# EAGLE board Quad_ESC (EAGLE 9.6.2)
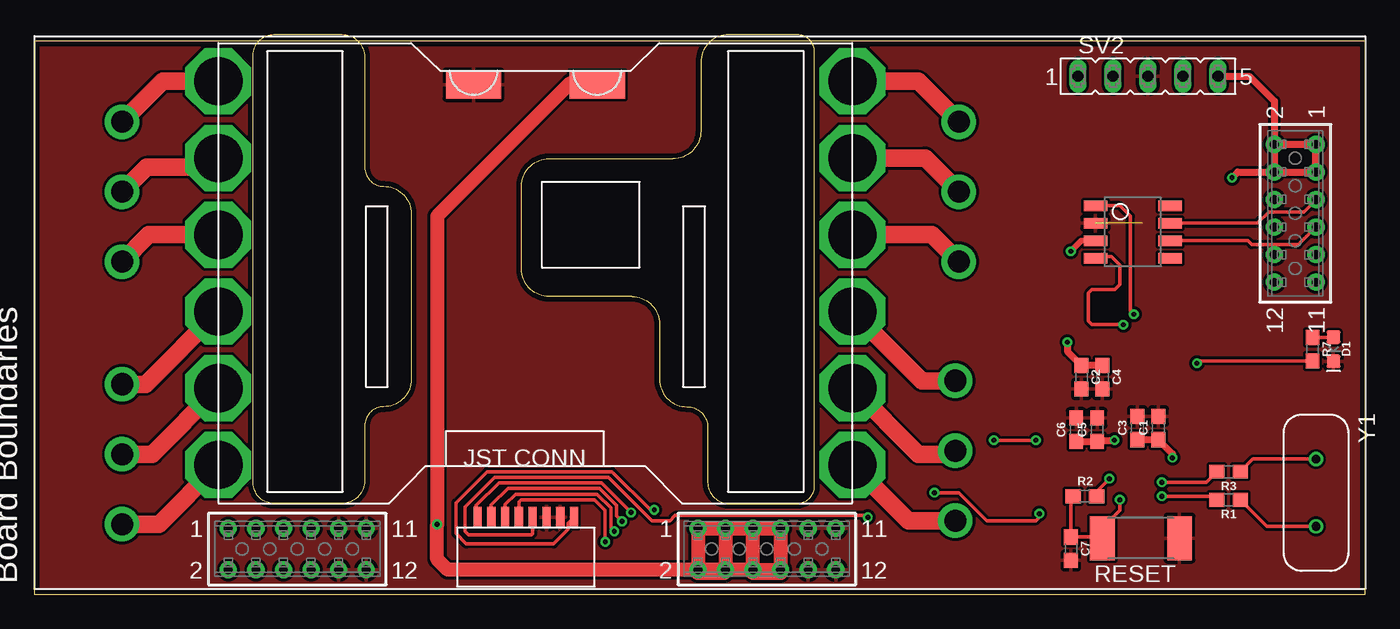
[diagram p0: board, top side]
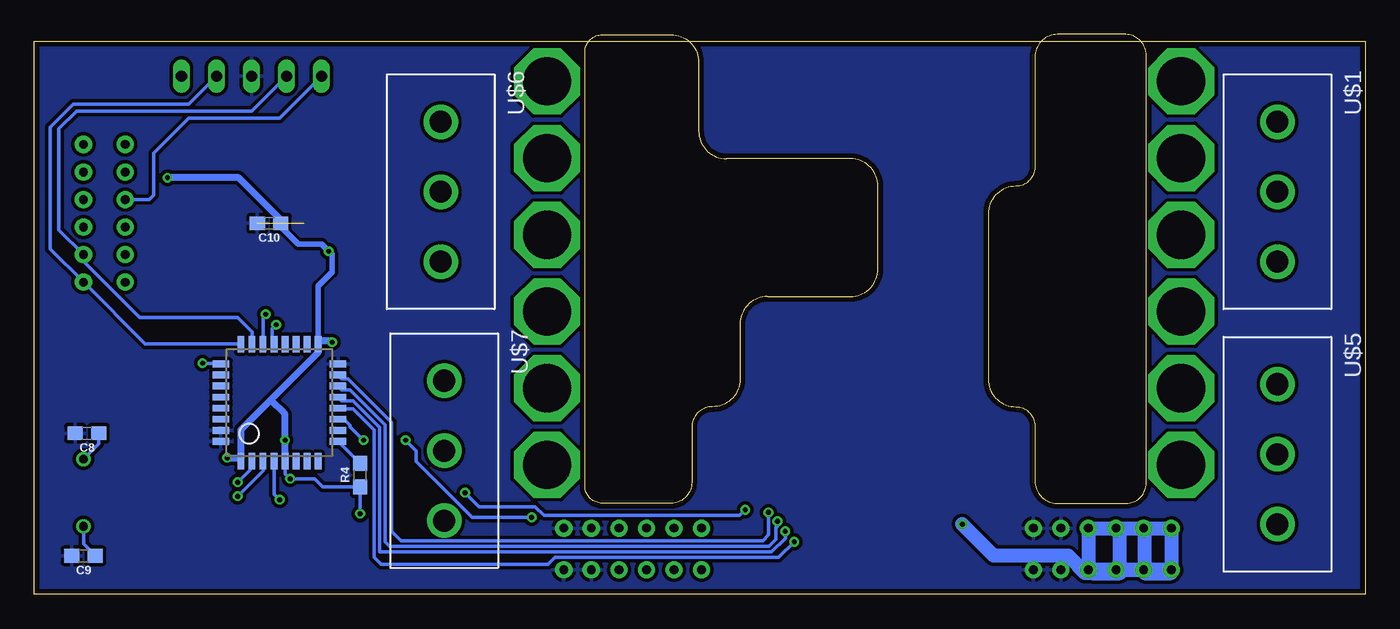
[diagram p1: board, bottom side, seen from below]

Size 96.52 x 40.13 mm. Coordinates in mm from the lower left corner, seen from the top.
Outline: 0,0 96.52,0 96.52,40.13 0,40.13 0,0
Copper layers (1*16): Top 0.0356mm / dielectric 1.5011mm / Bottom 0.0356mm
Design rules "ECE_Senior_Design": minimum track width 8mil, minimum drill 13mil, track to track 8mil, track to pad 8mil, pad to pad 6mil, via to via 8mil, smd to smd 6mil, copper to edge 15mil, drill to drill 8mil, minimum pad ring 7mil, minimum via ring 7mil, stop-mask expansion 3mil, vias tented up to drill 0mil, thermal gap 10mil

## Footprints (pad centres in the part's own frame; a part is rotated, then mirrored left to right if it is on the bottom)
0603 = smd 1.1 x 1: 1 -0.85,0; 2 0.85,0
LED-0603 = smd 1 x 1: A -0.877,0; C 0.877,0
SW_2512 = smd 1.8 x 3.2: 1 -2.8,0; 2 2.8,0
FE05-1 = drill 0.813 long: 1 -5.08,0; 2 -2.54,0; 3 0,0; 4 2.54,0; 5 5.08,0
3PINCONNECTOR = drill 1.6 pad 2.5: A -5.08,0; B 0,0; C 5.08,0
8PI_CONNECTOR = smd 0.6 x 1.5: P$1 1.5,-0.75; P$2 2.5,-0.75; P$3 3.5,-0.75; P$4 4.5,-0.75; P$5 5.5,-0.75; P$6 6.5,-0.75; P$7 7.5,-0.75; P$8 8.5,-0.75
BACKPLANE_CONNECTORS = drill 0.64 pad 1.24: 1 -5,1.511; 2 -5,-1.511; 3 -3,1.511; 4 -3,-1.511; 5 -1,1.511; 6 -1,-1.511; 7 1,1.511; 8 1,-1.511; 9 3,1.511; 10 3,-1.511; 11 5,1.511; 12 5,-1.511; 13 29.061,1.511; 14 29.061,-1.511; 15 31.061,1.511; 16 31.061,-1.511; 17 33.061,1.511; 18 33.061,-1.511; 19 35.061,1.511; 20 35.061,-1.511; 21 37.061,1.511; 22 37.061,-1.511; 23 39.061,1.511; 24 39.061,-1.511; 25 73.901,29.359; 26 70.879,29.359; 27 73.901,27.359; 28 70.879,27.359; 29 73.901,25.359; 30 70.879,25.359; 31 73.901,23.359; 32 70.879,23.359; 33 73.901,21.359; 34 70.879,21.359; 35 73.901,19.359; 36 70.879,19.359
STM32F042K6T6 = smd 1.2 x 0.5: NRST 0,3.2; PA0 0,1.6; PA1 0,0.8; PA2 0,0; PA8 8.5,0.8; PA9 8.5,1.6; PA10 8.5,2.4; PA11 8.5,3.2; PA12 8.5,4; PA13 8.5,4.8; PA14 8.5,5.6; PF0-OSC_IN 0,4.8; PF1-OSC_OUT 0,4; VDD 0,5.6; VDDA 0,2.4; VDDIO2 8.5,0 | smd 0.5 x 1.2: PA3 1.45,-1.45; PA4 2.25,-1.45; PA5 3.05,-1.45; PA6 3.85,-1.45; PA7 4.65,-1.45; PA15 7.05,7.05; PB0 5.45,-1.45; PB1 6.25,-1.45; PB3 6.25,7.05; PB4 5.45,7.05; PB5 4.65,7.05; PB6 3.85,7.05; PB7 3.05,7.05; PB8-BOOT0 2.25,7.05; VSS 7.05,-1.45; VSS1 1.45,7.05
TCAN337D = smd 1.7 x 0.75: CANH 5.4,2.54; CANL 5.4,1.27; FAULT 5.4,0; GND 0,2.54; RXD 0,0; S 5.4,3.81; TXD 0,3.81; VCC 0,1.27
LUMENIER_QUAD = drill 3.5 pad 4.8 octagon: 1 0,30.62; 2 0,25.05; 3 0,19.48; 4 0,13.92; 5 0,8.35; 6 0,2.78; 7 46,2.78; 8 46,8.35; 9 46,13.92; 10 46,19.48; 11 46,25.05; 12 46,30.62 | smd 4 x 2: GND 18.51,30.37; VIN 27.49,30.37
XTAL_ECS-80-S-4X = drill 0.63 pad 1.03: 1 -2.44,0; 2 2.44,0

## Placement (x,y rotation side)
C1  4.7uF  [0603]  81.53,12.06 90 top
C2  4.7uF  [0603]  75.95,15.75 270 top
C3  4.7uF  [0603]  80.01,12.06 90 top
C4  4.7uF  [0603]  77.47,15.75 270 top
C5  4.7uF  [0603]  77.09,11.94 90 top
C6  4.7uF  [0603]  75.56,11.94 90 top
C7  4.7uF  [0603]  75.18,3.3 270 top
C8  4.7uF  [0603]  92.71,11.68 180 bottom
C9  4.7uF  [0603]  92.96,2.79 180 bottom
C10  100nF  [0603]  79.5,26.92 180 bottom
D1  [LED-0603]  94.23,17.78 270 top
R1  1k  [0603]  86.61,6.86 180 top
R2  1k  [0603]  76.2,7.11 0 top
R3  1k  [0603]  86.61,8.89 180 top
R4  10k  [0603]  72.9,8.64 90 bottom
R7  [0603]  92.71,17.78 270 top
RESET  [SW_2512]  80.26,4.06 180 top
SV2  [FE05-1]  80.77,37.59 0 top
U$1  3PINCONNECTOR  [3PINCONNECTOR]  6.35,29.21 270 bottom
U$2  8PIN_CONNECTOR  [8PI_CONNECTOR]  40.64,4.83 180 top
U$3  BACKPLANE_CONNECTORS  [BACKPLANE_CONNECTORS]  19.06,3.28 0 top
U$4  STM32F042K6T6  [STM32F042K6T6]  75.95,9.65 90 bottom
U$5  3PINCONNECTOR  [3PINCONNECTOR]  6.35,10.16 270 bottom
U$6  3PINCONNECTOR  [3PINCONNECTOR]  67.06,29.21 270 bottom
U$7  3PINCONNECTOR  [3PINCONNECTOR]  66.8,10.41 270 bottom
U$8  TCAN337D  [TCAN337D]  76.96,24.38 0 top
U$10  LUMENIER_QUAD  [LUMENIER_QUAD]  13.34,6.6 0 top
Y1  ECS-80-S-4X  [XTAL_ECS-80-S-4X]  92.96,7.37 270 top

## Library data of the parts
C1-C10 = SparkFun-Capacitors; PROD_ID: CAP-08280
D1 = SparkFun-LED
R1-R3 = SparkFun-Resistors; PROD_ID: RES-07856
R4 = SparkFun-Resistors; PROD_ID: RES-00824
R7 = SparkFun-Resistors
RESET = DiscreteComponents
SV2 = con-lsta; OC_FARNELL: unknown; OC_NEWARK: unknown
U$1-U$3 U$5-U$7 U$10 = BLHeli_32 45A
U$4 U$8 = PI_Shield_Library
Y1 = ECS-80-S-4X; DESCRIPTION: Crystal 8MHz Series 2-Pin HC-49/U; DIGI-KEY_PART_NUMBER: X1057-ND; DIGI-KEY_PURCHASE_URL: https://www.digikey.com/product-detail/en/ecs-inc/ECS-80-S-4X/X1057-ND/827549?utm_source=snapeda&utm_medium=aggregator&utm_campaign=symbol; MF: ECS International; MP: ECS-80-S-4X; PACKAGE: HC-49/US ECS International

## Nets
+3V3: C1.1 C2.1 C3.1 C4.1 C5.1 C6.1 C10.1 R2.2 R4.1 SV2.5 U$2.P$1 U$3.25 U$3.26 U$3.27 U$3.28 U$4.VDD U$4.VDDA U$4.VDDIO2 U$8.VCC
+12V: U$3.1 U$3.2 U$3.3 U$3.4 U$3.5 U$3.6 U$3.7 U$3.8 U$3.13 U$3.14 U$3.15 U$3.16 U$3.17 U$3.18 U$3.19 U$3.20 U$10.VIN
CAN_H: U$3.29 U$8.CANH
CAN_L: U$3.31 U$8.CANL
CAN_RX: U$4.PA11 U$8.RXD
CAN_TX: U$4.PA12 U$8.TXD
ESC1_B: U$1.A U$10.1
ESC1_R: U$1.C U$10.3
ESC1_Y: U$1.B U$10.2
ESC2_B: U$5.A U$10.4
ESC2_R: U$5.C U$10.6
ESC2_Y: U$5.B U$10.5
ESC3_B: U$6.A U$10.12
ESC3_R: U$6.C U$10.10
ESC3_Y: U$6.B U$10.11
ESC4_B: U$7.A U$10.9
ESC4_R: U$7.C U$10.7
ESC4_Y: U$7.B U$10.8
GND: C1.2 C2.2 C3.2 C4.2 C5.2 C6.2 C7.2 C8.2 C9.2 C10.2 D1.C RESET.1 SV2.3 U$2.P$2 U$2.P$3 U$3.9 U$3.10 U$3.11 U$3.12 U$3.21 U$3.22 U$3.23 U$3.24 U$4.PB8-BOOT0 U$4.VSS U$4.VSS1 U$8.GND U$10.GND
LED: R7.2 U$4.PA15
N$1: C9.1 R1.1 Y1.2
N$2: C8.1 R3.1 Y1.1
N$3: R4.2 U$4.PA3
N$7: U$3.32
N$8: U$3.36
N$24: D1.A R7.1
NRST: SV2.1 U$3.30
NRST1: C7.1 R2.1 RESET.2 U$4.NRST
OSC_IN: R3.2 U$4.PF0-OSC_IN
OSC_OUT: R1.2 U$4.PF1-OSC_OUT
SWCLK: SV2.4 U$3.35 U$4.PA14
SWDIO: SV2.2 U$3.33 U$4.PA13
TIM3_CH1: U$2.P$5 U$4.PA6
TIM3_CH2: U$2.P$6 U$4.PA7
TIM3_CH3: U$2.P$7 U$4.PB0
TIM3_CH4: U$2.P$8 U$4.PB1
TLM: U$2.P$4 U$4.PA5

## Tracks (layer width: path | path; a pad name or v marks a point on that pad's centre or on a via)
+3V3  (via drill 0.35)
  Top 0.254: R2.2 77.05,7.45 v77.98,8.38 | U$2.P$1 38.72,5.16 38.72,4.71 37.67,3.66 31.33,3.66 30.58,4.4 30.58,6.64 32.83,8.89 41.91,8.89 44.68,6.12 v44.96,6.12 | v65.28,7.37 67.06,7.37 69.09,5.33 72.64,5.33 72.9,5.59 v72.9,5.84
  Top 0.406: U$8.VCC 75.95,25.65 v75.18,24.89
  Top 0.508: C6.1 C5.1 77.18,11.18 v78.35,11.18 | C3.1 C1.1 82.55,10.2 v82.55,9.91 | C4.1 C2.1 74.93,17.61 v74.93,18.29 | SV2.5 88.14,37.59 89.94,35.79 U$3.26 | v86.87,30.23 87.28,30.64 U$3.28 | U$3.26 U$3.28 | U$3.28 U$3.27 U$3.25 U$3.26
  Bottom 0.254: U$4.VDDA 78.35,8.75 v77.98,8.38 76.2,8.38 75.6,7.79 R4.1 v72.9,5.84 | v44.96,6.12 45.36,5.71 59.56,5.71 60.2,6.35 64.26,6.35 v65.28,7.37
  Bottom 0.406: U$4.VDDIO2 75.95,22.35 74.93,23.37 74.93,24.64 v75.18,24.89 75.69,25.4 77.38,25.4 78.65,26.67 C10.1
  Bottom 0.508: U$4.VDDIO2 75.96,18.14 | 75.96,18.14 75.96,18.39 75.03,18.39 v74.93,18.29 | 75.96,18.14 75.96,17.51 79.38,14.1 | 79.38,14.1 81.55,11.93 U$4.VDD 81.55,9.91 v82.55,9.91 | U$4.VDDA v78.35,11.18 78.35,13.07 79.38,14.1 | C10.1 78.65,27.18 81.7,30.23 v86.87,30.23
+12V  (via drill 0.35)
  Top 1.016: 52.12,1.52 54.12,1.52 U$3.19 U$3.15 | 52.12,1.52 U$3.17 U$3.15 | U$3.14 48.12,1.52 50.04,1.52 50.12,1.61 U$3.15 | U$3.18 U$3.14 | U$3.15 U$3.13 U$3.14 | U$3.14 29.98,1.77 29.21,2.54 v29.21,5.08 29.21,27.43 38.86,37.08 38.97,36.97 U$10.VIN | U$3.18 U$3.20 | U$3.18 U$3.16 51.88,1.77 52.12,1.52
  Bottom 1.016: U$3.2 U$3.4 | U$3.3 16,4.74 16,1.52 14.06,1.52 U$3.1 U$3.5 | U$3.5 17.78,4.51 17.78,1.52 | v29.21,5.08 26.93,2.8 21.53,2.8 20.78,2.05 20.78,1.99 20.32,1.52 20.06,1.52 U$3.7 U$3.5 | U$3.4 17.53,1.77 17.78,1.52 | 17.78,1.52 19.81,1.52 U$3.8 U$3.4 | U$3.6 U$3.4
CAN_H
  Top 0.254: U$8.CANH 88.71,26.92 89.53,27.74 92.06,27.74 U$3.29
CAN_L
  Top 0.254: U$8.CANL 88.01,25.65 88.3,25.36 91.68,25.36 U$3.31
CAN_RX  (via drill 0.35)
  Top 0.254: v78.99,19.56 76.71,19.56 76.45,19.81 76.45,21.84 76.71,22.1 78.36,22.1 78.74,22.48 78.74,23.88 78.11,24.51 77.09,24.51 U$8.RXD
  Bottom 0.254: U$4.PA11 79.27,18.28 79.27,19.28 v78.99,19.56
CAN_TX  (via drill 0.35)
  Top 0.254: v79.76,20.32 79.5,20.57 79.5,27.43 78.74,28.19 U$8.TXD
  Bottom 0.254: U$4.PA12 79.95,20.13 v79.76,20.32
ESC1_B
  Top 1.27: U$1.A 9.28,37.22 U$10.1
ESC1_R
  Top 1.27: U$1.C 8.3,26.08 U$10.3
ESC1_Y
  Top 1.016: U$10.2 12.95,31.27 12.95,30.99
  Top 1.27: U$1.B 8.13,30.99 12.95,30.99
ESC2_B
  Top 1.27: U$10.4 8.05,15.24 U$5.A
ESC2_R
  Top 1.27: U$10.6 9.03,5.08 U$5.C
ESC2_Y
  Top 1.27: U$10.5 8.54,10.16 U$5.B
ESC3_B
  Top 1.27: U$6.A 64.12,37.22 U$10.12
ESC3_R
  Top 1.27: U$10.10 65.1,26.08 U$6.C
ESC3_Y
  Top 1.27: U$10.11 64.61,31.65 U$6.B
ESC4_B
  Top 1.27: U$10.9 64.36,15.49 U$7.A
ESC4_R
  Top 1.27: U$10.7 63.38,5.33 U$7.C
ESC4_Y
  Top 1.016: U$7.B 66.55,10.16 66.29,10.16
  Top 1.27: U$10.8 64.13,10.16 66.29,10.16
GND  (1 unrouted)
  pour Bottom (isolate 0.254, rank 6): -0.51,43.94 98.3,43.94 100.84,41.4 100.84,-0.25 98.04,-3.05 -1.52,-3.05 -4.57,0 -4.57,39.88
  pour Top (rank 6): -2.29,39.88 -2.29,0.25 0,-2.03 96.27,-2.03 99.06,0.76 99.06,39.12 97.28,40.89 -1.27,40.89
LED  (via drill 0.35)
  Top 0.254: R7.2 84.49,16.93 v84.33,16.76
  Bottom 0.254: v84.33,16.76 83.06,16.76 U$4.PA15
N$1
  Top 0.254: R1.1 89.4,4.93 Y1.2
  Bottom 0.254: C9.1 92.96,3.64 Y1.2
N$2
  Top 0.254: R3.1 88.38,9.81 Y1.1
  Bottom 0.254: C8.1 91.86,10.91 Y1.1
N$3
  Bottom 0.254: R4.2 74.5,11.08 U$4.PA3
N$24
  Top 0.254: D1.A 94.21,18.63 R7.1
NRST
  Bottom 0.254: SV2.1 78.74,34.54 85.34,34.54 87.88,32 87.88,28.96 88.2,28.64 U$3.30
NRST1  (via drill 0.35)
  Top 0.254: 76.96,3.3 77.22,3.56 77.46,3.8 RESET.2 | v78.74,6.86 78.74,6.1 77.46,4.83 RESET.2 | R2.1 75.18,6.95 C7.1 76.71,4.15 76.8,4.06 RESET.2
  Bottom 0.254: U$4.NRST 79.15,7.26 v78.74,6.86
OSC_IN  (via drill 0.35)
  Top 0.254: R3.2 85,8.13 v81.79,8.13
  Bottom 0.254: v81.79,8.13 80.75,9.17 U$4.PF0-OSC_IN
OSC_OUT  (via drill 0.35)
  Top 0.254: v81.79,7.11 85.51,7.11 R1.2
  Bottom 0.254: U$4.PF1-OSC_OUT 79.95,8.95 v81.79,7.11
SWCLK
  Bottom 0.254: U$4.PA14 88.47,18.15 U$3.35 95.38,25.06 95.38,33.91 93.73,35.56 85.34,35.56 SV2.4
SWDIO
  Bottom 0.254: U$4.PA13 80.75,19.02 81.79,20.07 88.9,20.07 92.96,24.13 U$3.33 94.74,26.42 94.74,33.78 93.47,35.05 80.77,35.05 SV2.2
TIM3_CH1  (via drill 0.35)
  Top 0.254: U$2.P$5 35.14,6.69 35.31,6.86 40.64,6.86 41.4,6.1 v41.4,3.81
  Bottom 0.254: v41.4,3.81 42.54,2.67 58.75,2.67 59.27,2.16 71.37,2.16 71.88,2.67 71.88,11.94 73.41,13.46 74.46,13.46 U$4.PA6
TIM3_CH2  (via drill 0.35)
  Top 0.254: v42.06,4.57 41.81,4.82 41.81,6.26 40.81,7.26 34.88,7.26 34.14,6.52 U$2.P$6
  Bottom 0.254: U$4.PA7 74.22,14.03 73.4,14.03 71.48,12.11 71.48,3.09 71.47,3.08 43.05,3.08 42.06,4.07 v42.06,4.57
TIM3_CH3  (via drill 0.35)
  Top 0.254: U$2.P$7 33.14,6.47 34.34,7.67 40.98,7.67 42.22,6.43 42.22,5.7 v42.63,5.29
  Bottom 0.254: v42.63,5.29 42.63,4.93 42.72,4.84 42.72,3.99 43.22,3.49 70.75,3.49 71.07,3.81 71.07,12.28 73.63,14.83 74.22,14.83 U$4.PB0
TIM3_CH4  (via drill 0.35)
  Top 0.254: U$2.P$8 32.05,5.66 32.05,6.44 33.69,8.08 41.15,8.08 42.62,6.6 42.62,6.58 v43.27,5.93
  Bottom 0.254: U$4.PB1 74.22,15.63 73.78,15.63 70.61,12.46 70.61,4.57 69.93,3.89 43.69,3.89 43.28,4.29 43.28,5.56 43.27,5.58 v43.27,5.93
TLM  (via drill 0.35)
  Top 0.254: U$2.P$4 36.14,4.39 36.07,4.32 31.5,4.32 31.24,4.57 31.24,6.35 33.38,8.48 41.65,8.48 44.8,5.33 46.1,5.33 46.48,5.71 60.33,5.71 v60.45,5.59 | v69.6,11.18 v72.64,11.18
  Bottom 0.254: v60.45,5.59 64.77,5.59 68.83,9.65 68.83,10.41 v69.6,11.18 | v72.64,11.18 73.62,12.15 73.62,12.27 74.05,12.7 U$4.PA5